# Altium PCB PCB1.PcbDoc
Units mil, origin at the board's own origin, x right, y up, seen from the top; angles counter-clockwise.
Board outline 6000 x 4000 mil, 2 copper layers (Top Layer, Bottom Layer); 8 components, 7 nets, 36 pads, 10 vias.
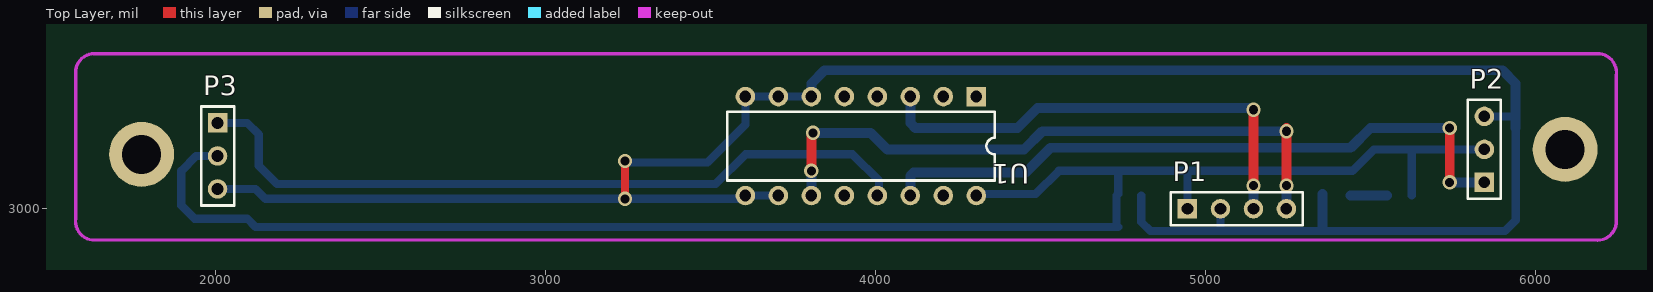
[diagram p0: Top Layer view]
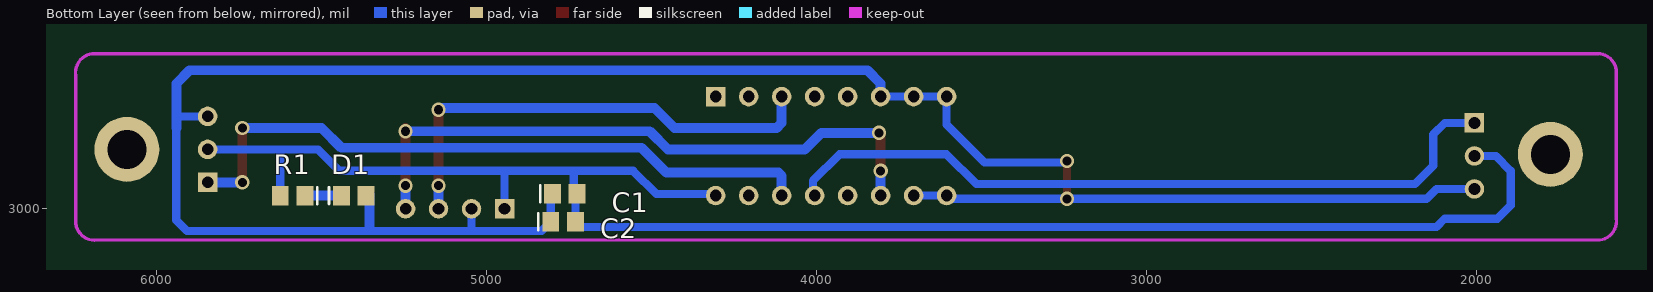
[diagram p1: Bottom Layer view, seen from below]

## Layer stack, top to bottom
Top Layer: signal copper 1.4
Dielectric: dielectric 12.6, FR-4, Dk 4.8
Bottom Layer: signal copper 1.4

## Board outline
1000,1000 7000,1000 7000,5000 1000,5000

## Design rules (kind name [scope] priority, off if disabled: settings)
Clearance [All] p1: gap=10
ComponentClearance [All] p1: gap=10 collisioncheckmode=3 verticalgap=10
PolygonConnect [All] p1: connectstyle=Relief reliefconductorwidth=10 reliefentries=4 polygonreliefangle="90 Angle"
RoutingVias [All] p1: holewidth=28 width=50 viastyle="Through Hole" minholewidth=28 minwidth=50 maxholewidth=28 maxwidth=50
SolderMaskExpansion [All] p1: expansion=4
TestPointUsage [All] p1: valid=0 allowmultiple=FALSE
Testpoint [All] p1: side=15 testpointundercomponent=TRUE minsize=40 maxsize=100 preferedsize=60 minholesize=0 maxholesize=40 preferedholesize=32 testpointgrid=1 style=1023 order=0-112345678
Width [All] p1: maxlimit=50 minlimit=10 preferedwidth=30
18 further rules are at their usual default settings.

## Components (designator, comment, footprint, x,y, rotation, side; value= is the part's Value field where it differs from the comment)
C1 "Cap" C0805 4762.6,3045 r180 bottom
C2 "Cap" C0805 4767.6,2960 r180 bottom
D1 "LED0" C0805 5402.4,3040 r180 bottom
P1 "Header 4" HDR1X4 4945,3000 r0 top
P2 "Header 3" HDR1X3 5845,3080 r90 top
P3 "Header 3" HDR1X3 2005,3260 r270 top
R1 "Res2" C0805 5587.6,3040 r0 bottom
U1 "CD4051" DIP-16 3955,3190 r180 top

## Footprints (in the part's own frame and the unit in brackets; to place one, negate y for a bottom-side part, rotate by r counter-clockwise, add the part's x,y. Pads: shape width x height; smd on the part's side, far side on the other; paste and mask are expansions set on the pad)
C0805 [mm] "Chip Capacitor; Body 2.0 x 1.2 mm (LxW typ)"
  rect 1.3x1.5 smd: 1(-0.95,0) 2(0.95,0)
  silkscreen extent -1.9,-0.65 -1.9,0.65
DIP-16 [mm] "DIP; 16 Leads; Row Spacing 7.62 mm; Pitch 2.54 mm"
  rect 1.5x1.5 hole 0.9: 1(-8.89,-3.81)
  round 1.5 hole 0.9: 2(-6.35,-3.81) 3(-3.81,-3.81) 4(-1.27,-3.81) 5(1.27,-3.81) 6(3.81,-3.81) 7(6.35,-3.81) 8(8.89,-3.81) 9(8.89,3.81) 10(6.35,3.81) 11(3.81,3.81) 12(1.27,3.81) 13(-1.27,3.81) 14(-3.81,3.81) 15(-6.35,3.81) 16(-8.89,3.81)
  silkscreen extent -10.3,-2.65 10.3,2.65
HDR1X3 [mm] "Connector; Header; 3 Position"
  rect 1.5x1.5 hole 0.9: 1(0,0)
  round 1.5 hole 0.9: 2(2.54,0) 3(5.08,0)
  silkscreen extent -1.27,-1.27 6.35,1.27
HDR1X4 [mm] "Connector; Header; 4 Position"
  rect 1.5x1.5 hole 0.9: 1(0,0)
  round 1.5 hole 0.9: 2(2.54,0) 3(5.08,0) 4(7.62,0)
  silkscreen extent -1.27,-1.27 8.89,1.27

## Part data
C1 C2: "Capacitor"
D1: "Typical INFRARED GaAs LED"
P1: "Header, 4-Pin"
P2 P3: "Header, 3-Pin"
R1: "Resistor"
U1: library part Component_1

## Free pads (board coordinates)
  round 196.85 hole 118.11: 0(6090,3180) 1(1775,3165)

## Via types
v1: diameter 43.31, hole 27.56, Top Layer to Bottom Layer, 10 vias

## Nets (pads, with @x,y where several pads share a name; then routed paths per layer and width w, separated by ;. In a path a pad name is that pad's centre, name@x,y a point inside that pad or via, vN(x,y) a via of type N, cw(c..) or ccw(c..) an arc to the next point about the centre after c; other vN are vias at no path point)
GND: C1.1 C2.1 D1.2 P1.2 P2.3 P3.3 U1.6 U1.7 U1.8 U1.9 U1.10 | length 6686.1
  Top Layer w25: v1(3240,3030) v1(3240,3145)
  Bottom Layer w25: P3.3@2010,3050 2012.5,3052.5 2020,3060 2120,3060 2150,3030 v1(3240,3030) U1.9@3605,3030 ; v1@3250,3140 3490,3140 3605,3255 U1.8 ; U1.8@3595,3330 U1.8 ; U1.10 U1.9 U1.9@3600,3040 ; U1.6 U1.7 U1.8 ; C1.1@4805,3040 C2.1 4832.58,2932.42 5045,2932.42 ; P1.2 5045,2932.42 ; P2.3 5940,3280 ; 5940,3245 5940,2965 5907.42,2932.42 5045,2932.42 ; U1.9@3600,3040 3595,3040 3595,3035 U1.9@3600,3040
  Bottom Layer w30: U1.6 3805,3380 3845,3420 5900,3420 5940,3380 5940,3280 5940,3245 ; 5355,2934.92 5355,3040 D1.2@5355,3045
L: P2.1 U1.14 | length 2030.1
  Top Layer w30: v1(5740,3080) v1(5740,3245)
  Bottom Layer w30: U1.14@4105,3030 U1.14 4105,3100 4115,3110 4455,3110 4530,3185 5440,3185 5500,3245 v1@5735,3245 ; v1(5740,3080) P2.1
NetD1_1: D1.1 R1.1 | length 110.4
  Bottom Layer w30: D1.1 R1.1
PAX: P1.4 U1.11 | length 1925.6
  Top Layer w30: v1(3805,3115) 3805,3225 v1(3810,3230) ; v1(5245,3070) v1(5245,3235) v1@5245,3245
  Bottom Layer w25: v1(5245,3070) v1@5245,3075
  Bottom Layer w30: U1.11 v1(3805,3115) ; v1@3805,3230 v1(3810,3230) 3985,3230 4035,3180 4450,3180 4505,3235 v1(5245,3235) ; P1.4 v1(5245,3070)
PT7: P1.3 U1.3 | length 1451.1
  Top Layer w30: v1(5145,3070) v1(5145,3300)
  Bottom Layer w30: U1.3 4105,3260 4120,3245 4430,3245 4490,3305 v1@5145,3305 ; P1.3 v1(5145,3070)
R: P3.1 U1.13 | length 2254.8
  Bottom Layer w25: P3.1 2095,3260 2130,3225 2130,3130 2185,3075 3515,3075 3605,3165 3930,3165 4010,3085 4010,3045 U1.13
VCC: C1.2 C2.2 P1.1 P2.2 P3.2 R1.2 U1.16 | length 5108.5
  Bottom Layer w25: P3.2 1940,3160 1895,3115 1895,3010 1935,2970 2095,2970 2120,2945 4730.2,2945 C2.2@4735,2945 ; U1.16@4295,3045 4305,3045 4485,3045 4555,3115 4735,3115 ; C2.2 4730.2,3040 4735,3044.8 4735,3045 4735,3115 ; P1.1 4945,3105 ; R1.2 5625,3180 ; P2.2 5625,3180 ; 4735,3115 5445,3115 5510,3180 5625,3180
pads on no net: U1.1 U1.2 U1.4 U1.5 U1.12 U1.15

## Keep-outs
Keep-Out Layer:
  lines w9.84: 1575,2970 1575,2990 1575,3360 1575,3420 ; 1625,2905 6180,2905 ; 1630,3470 4760,3470 6170,3470 6195,3470 ; 6245,2955 6245,2985 6245,3260 6245,3330 6245,3345 6245,3405
  lines w10: 1575,2970 ccw(c1632.5,2962.5) 1625,2905 ; 1575,3420 cw(c1632.5,3412.5) 1640,3470 ; 6180,2905 ccw(c6187.5,2962.5) 6245,2955 ; 6195,3470 cw(c6187.5,3412.5) 6245,3405

## Dimensions
6240,2930 to 1585,2940 on Top Overlay